# Altium PCB xia.PcbDoc
Units mil, origin at the board's own origin, x right, y up, seen from the top; angles counter-clockwise.
Board outline 5748.08 x 1771.65 mil, 2 copper layers (Top Layer, Bottom Layer); 4 components, 41 nets, 122 pads, 0 vias.
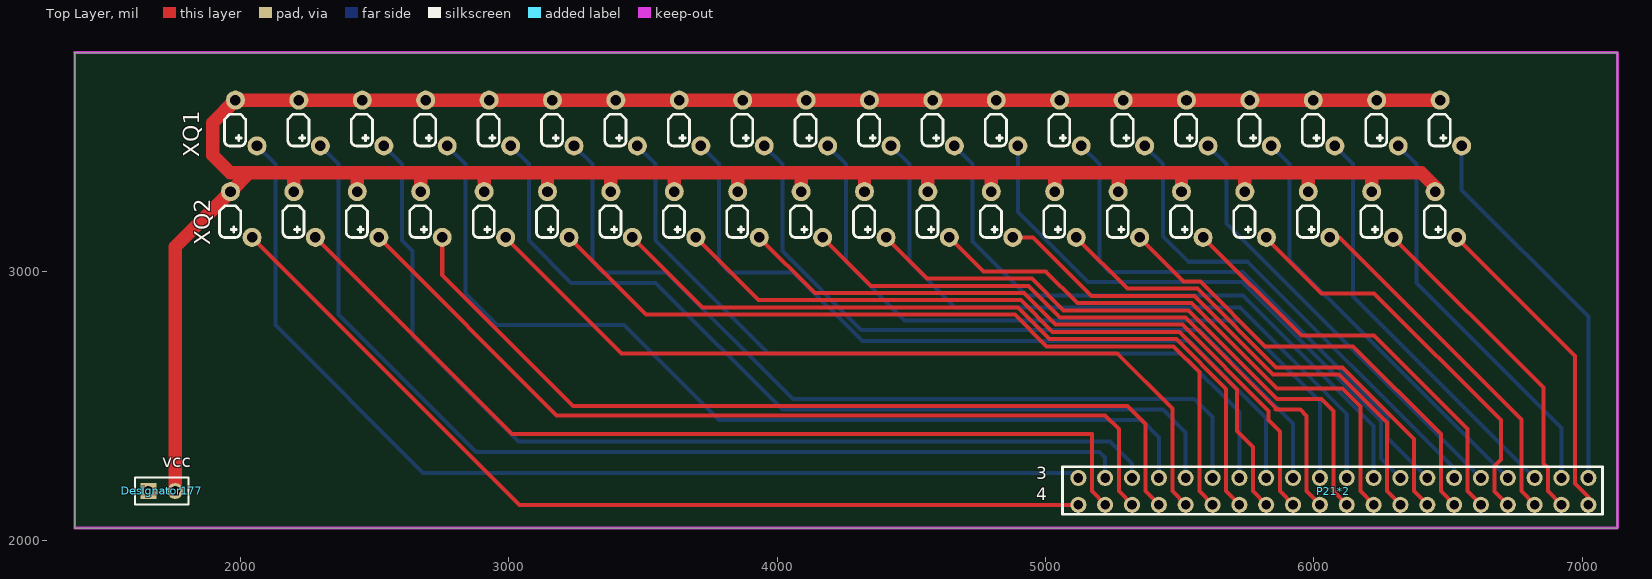
[diagram p0: Top Layer view]
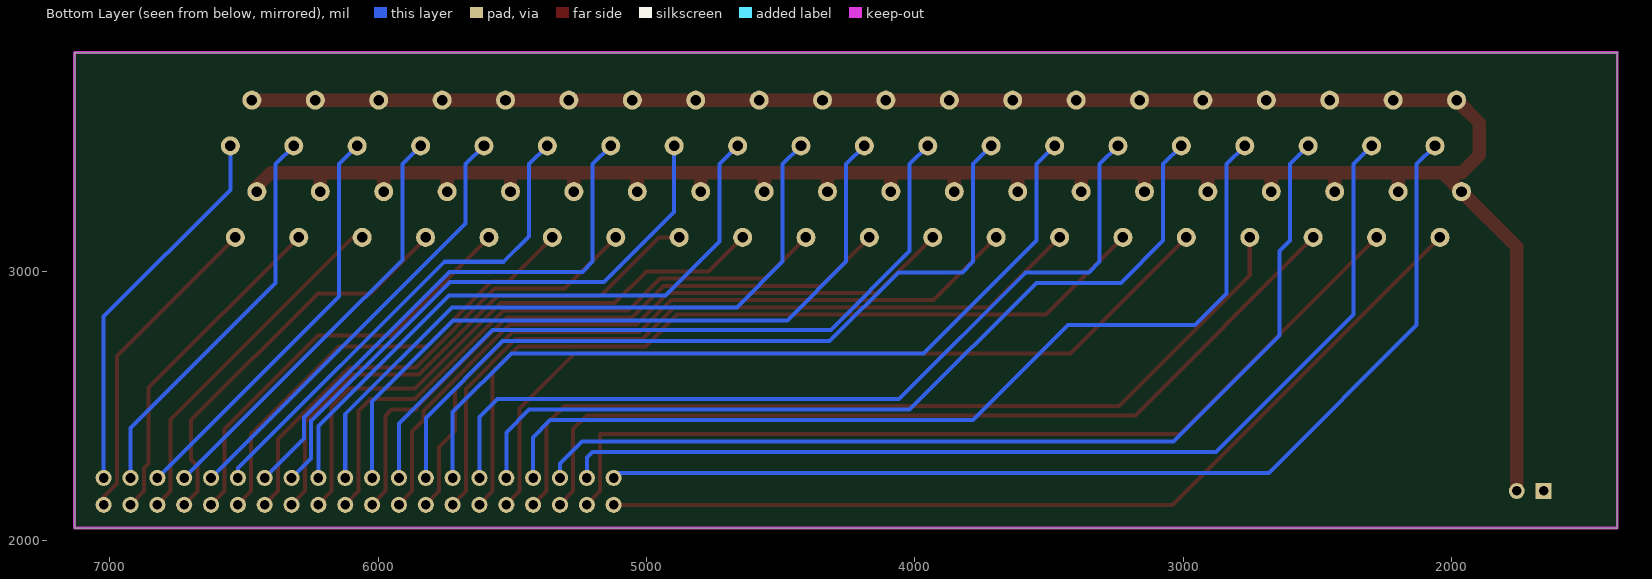
[diagram p1: Bottom Layer view, seen from below]

## Layer stack, top to bottom
Top Layer: signal copper 1.4
Dielectric: dielectric 12.6, FR-4, Dk 4.8
Bottom Layer: signal copper 1.4

## Board outline
1382.8,2044.94 1382.8,3816.55 1382.84,3816.6 7130.87,3816.6 7130.87,2044.94

## Design rules (kind name [scope] priority, off if disabled: settings)
Clearance [All] p1: gap=7
PolygonConnect [All] p1: connectstyle=Relief reliefconductorwidth=10 reliefentries=4 polygonreliefangle="90 Angle" airgapwidth=10
RoutingVias [All] p1: holewidth=28 width=50 viastyle="Through Hole" minholewidth=28 minwidth=50 maxholewidth=28 maxwidth=50
SilkToSolderMaskClearance [IsPad] p1: minsilkscreentomaskgap=0 clearancetoexposedcopper=TRUE
SolderMaskExpansion [All] p1: expansion=4
Width [All] p1: maxlimit=100 minlimit=7 preferedwidth=10
27 further rules are at their usual default settings.

## Components (designator, comment, footprint, x,y, rotation, side; value= is the part's Value field where it differs from the comment)
Designator177 "" HDR1X2 1657,2183 r0 top
P21*2 "Header 21X2" XinPian 5122.14,2131.56 r180 top
XQ1 "Header 20X2" XIANQUAN1 6550.17,3468.57 r180 top
XQ2 "Header 20X2" XIANQUAN1 6531.61,3127.62 r180 top

## Footprints (in the part's own frame and the unit in brackets; to place one, negate y for a bottom-side part, rotate by r counter-clockwise, add the part's x,y. Pads: shape width x height; smd on the part's side, far side on the other; paste and mask are expansions set on the pad)
HDR1X2 [mm] "Connector; Header; 2 Position"
  rect 1.5x1.5 hole 0.9: 1(0,0)
  round 1.5 hole 0.9: 2(2.54,0)
  silkscreen extent -1.27,-1.27 3.81,1.27
XIANQUAN1 [mm]
  round 1.8 hole 1: 1(2.04,-4.34) 2(0,0) 3(8.04,-4.34) 4(6,0) 5(14.04,-4.34) 6(12,0) 7(20.04,-4.34) 8(18,0) 9(26.04,-4.34) 10(24,0) 11(32.04,-4.34) 12(30,0) 13(38.04,-4.34) 14(36,0) 15(44.04,-4.34) 16(42,0) 17(50.04,-4.34) 18(48,0) 19(56.04,-4.34) 20(54,0) 21(62.04,-4.34) 22(60,0) 23(68.04,-4.34) 24(66,0) 25(74.04,-4.34) 26(72,0) 27(80.04,-4.34) 28(78,0) 29(86.04,-4.34) 30(84,0) 31(92.04,-4.34) 32(90,0) 33(98.04,-4.34) 34(96,0) 35(104.04,-4.34) 36(102,0) 37(110.04,-4.34) 38(108,0) 39(116.04,-4.34) 40(114,0)
  silkscreen extent 1.08,-3 117.08,0
XinPian [mil]
  round 60 hole 36: 1(0,-100) 2(-100,-100) 3(-200,-100) 4(-300,-100) 5(-400,-100) 6(-500,-100) 7(-600,-100) 8(-700,-100) 9(-800,-100) 10(-900,-100) 11(-1000,-100) 12(-1100,-100) 13(-1200,-100) 14(-1300,-100) 15(-1400,-100) 16(-1500,-100) 17(-1600,-100) 18(-1700,-100) 19(-1800,-100) 20(-1900,-100) 21(-1900,0) 22(-1800,0) 23(-1700,0) 24(-1600,0) 25(-1500,0) 26(-1400,0) 27(-1300,0) 28(-1200,0) 29(-1100,0) 30(-1000,0) 31(-900,0) 32(-800,0) 33(-700,0) 34(-600,0) 35(-500,0) 36(-400,0) 37(-300,0) 38(-200,0) 39(-100,0) 40(0,0)
  silkscreen extent -1953,-142 59,35

## Part data
P21*2: library part "Header 22X2", "Header, 22-Pin, Dual row"
XQ1 XQ2: "Header, 20-Pin, Dual row"

## Nets (pads, with @x,y where several pads share a name; then routed paths per layer and width w, separated by ;. In a path a pad name is that pad's centre, name@x,y a point inside that pad or via, vN(x,y) a via of type N, cw(c..) or ccw(c..) an arc to the next point about the centre after c; other vN are vias at no path point)
GND: Designator177.2 XQ1.1 XQ1.3 XQ1.5 XQ1.7 XQ1.9 XQ1.11 XQ1.13 XQ1.15 XQ1.17 XQ1.19 XQ1.21 XQ1.23 XQ1.25 XQ1.27 XQ1.29 XQ1.31 XQ1.33 XQ1.35 XQ1.37 XQ1.39 XQ2.1 XQ2.3 XQ2.5 XQ2.7 XQ2.9 XQ2.11 XQ2.13 XQ2.15 XQ2.17 XQ2.19 XQ2.21 XQ2.23 XQ2.25 XQ2.27 XQ2.29 XQ2.31 XQ2.33 XQ2.35 XQ2.37 XQ2.39 | length 11927.5
  Top Layer w50: Designator177.2 1757,3092.39 XQ2.39 2032.79,3368.17 ; XQ2.37 2199.32,3366.6 2200.9,3368.17 ; XQ2.35 2435.54,3365.81 2437.9,3368.17 ; XQ2.33 2671.76,3364.63 2675.31,3368.17 ; XQ2.31 2907.98,3366.6 2909.56,3368.17 ; XQ2.29 3144.2,3365.81 3146.57,3368.17 ; XQ2.27 3380.42,3360.69 3387.9,3368.17 ; XQ2.25 3616.64,3361.87 3622.94,3368.17 ; XQ2.23 3852.87,3368.17 ; XQ2.21 4089.09,3367.78 ; XQ2.19 4325.31,3367.78 ; XQ2.17 4561.53,3362.66 4567.04,3368.17 ; XQ2.15 4797.75,3365.81 4800.11,3368.17 ; XQ2.13 5033.97,3360.69 5041.45,3368.17 ; XQ2.11 5270.19,3364.63 5273.73,3368.17 ; XQ2.9 5506.41,3358.72 5515.86,3368.17 ; XQ2.7 5742.63,3362.66 5748.14,3368.17 ; XQ2.5 5978.85,3366.6 5980.42,3368.17 ; XQ2.3 6215.07,3367.78 6215.46,3368.17 ; XQ2.1 6451.29,3316.2 6399.32,3368.17 6215.46,3368.17 ; XQ1.1 XQ1.39 1897.35,3555.12 1897.35,3433.53 1962.71,3368.17 2032.79,3368.17 ; 2032.79,3368.17 2200.9,3368.17 ; 2200.9,3368.17 2437.9,3368.17 ; 2437.9,3368.17 2675.31,3368.17 ; 2675.31,3368.17 2909.56,3368.17 ; 2909.56,3368.17 3146.57,3368.17 ; 3146.57,3368.17 3387.9,3368.17 ; 3387.9,3368.17 3622.94,3368.17 ; 3622.94,3368.17 3852.87,3368.17 ; 3852.87,3368.17 4567.04,3368.17 ; 4567.04,3368.17 4800.11,3368.17 ; 4800.11,3368.17 5041.45,3368.17 ; 5041.45,3368.17 5273.73,3368.17 ; 5273.73,3368.17 5515.86,3368.17 ; 5515.86,3368.17 5748.14,3368.17 ; 5748.14,3368.17 5980.42,3368.17 ; 5980.42,3368.17 6215.46,3368.17
XQ1_1: P21*2.20 XQ1.2 | length 1432.5
  Bottom Layer w15: XQ1.2 6550.17,3304.83 7022.14,2832.86 P21*2.20
XQ1_2: P21*2.19 XQ1.4 | length 1488.9
  Bottom Layer w15: XQ1.4 6381.98,3400.53 6381.98,2958.33 6922.14,2418.17 P21*2.19
XQ1_3: P21*2.18 XQ1.6 | length 1545.4
  Bottom Layer w15: XQ1.6 6145.76,3400.53 6145.76,2907.94 P21*2.18
XQ1_4: P21*2.17 XQ1.8 | length 1602.2
  Bottom Layer w15: XQ1.8 5909.54,3400.53 5909.54,3043.46 6191.52,2761.48 6192.22,2761.48 P21*2.17
XQ1_5: P21*2.16 XQ1.10 | length 1658.2
  Bottom Layer w15: XQ1.10 5673.32,3400.53 5673.32,3180.38 P21*2.16
XQ1_6: P21*2.15 XQ1.12 | length 1844.1
  Bottom Layer w15: XQ1.12 5437.1,3400.53 5437.1,3131.9 5532,3037 5753,3037 6522.14,2267.86 P21*2.15
XQ1_7: P21*2.14 XQ1.14 | length 2060.5
  Bottom Layer w15: XQ1.14 5200.88,3400.53 5200.88,3037.07 5238.95,2999 5733,2999 6275.76,2456.24 6275.76,2377.94 P21*2.14
XQ1_8: P21*2.13 XQ1.16 | length 2163.2
  Bottom Layer w15: XQ1.16 4896.62,3223.22 5157.84,2962 5731,2962 6248.95,2444.05 6248.95,2304.75 P21*2.13
XQ1_9: P21*2.12 XQ1.18 | length 2356.6
  Bottom Layer w15: XQ1.18 4728.44,3400.53 4728.44,3112.56 4929,2912 5736,2912 6222.14,2425.86 P21*2.12
XQ1_10: P21*2.11 XQ1.20 | length 2562.3
  Bottom Layer w15: XQ1.20 4492.22,3400.53 4492.22,3037.07 4662.29,2867 5724,2867 6122.14,2468.86 P21*2.11
XQ1_11: P21*2.10 XQ1.22 | length 2726.6
  Bottom Layer w15: XQ1.22 4256,3400.53 4256,3037.07 4474.07,2819 5720,2819 6022.14,2516.86 P21*2.10
XQ1_12: P21*2.9 XQ1.24 | length 2791.2
  Bottom Layer w15: XQ1.24 4019.78,3400.53 4019.78,3076.44 4313.22,2783 5573.06,2783 5922.14,2433.92 P21*2.9
XQ1_13: P21*2.8 XQ1.26 | length 2962.9
  Bottom Layer w15: XQ1.26 3783.56,3400.53 3783.56,3037.07 3822.93,2997.7 4060.6,2997.7 4317.3,2741 5536.32,2741 5822.14,2455.18 P21*2.8
XQ1_14: P21*2.7 XQ1.28 | length 3065.5
  Bottom Layer w15: XQ1.28 3547.34,3400.53 3547.34,3115.81 3967.15,2696 5502.58,2696 5722.14,2476.44 P21*2.7
XQ1_15: P21*2.6 XQ1.30 | length 3237.2
  Bottom Layer w15: XQ1.30 3311.12,3400.53 3311.12,3037.07 3350.49,2997.7 3586.71,2997.7 4059.15,2525.26 5555.21,2525.26 5622.14,2458.33 P21*2.6
XQ1_16: P21*2.5 XQ1.32 | length 3293.6
  Bottom Layer w15: XQ1.32 3074.9,3400.53 3074.9,3115.81 3232.38,2958.33 3547.34,2958.33 4019.78,2485.89 5437.1,2485.89 5522.14,2400.85 P21*2.5
XQ1_17: P21*2.4 XQ1.34 | length 3534.5
  Bottom Layer w15: XQ1.34 2838.68,3400.53 2838.68,2918.96 2956.79,2800.85 3429.23,2800.85 3783.56,2446.52 5358.36,2446.52 5422.14,2382.74 P21*2.4
XQ1_18: P21*2.3 XQ1.36 | length 3683.2
  Bottom Layer w15: XQ1.36 2602.46,3400.53 2602.46,3115.81 2641.83,3076.44 2641.83,2761.48 3035.53,2367.78 5240.25,2367.78 5322.14,2285.89 P21*2.3
XQ1_19: P21*2.2 XQ1.38 | length 3808.8
  Bottom Layer w15: XQ1.38 2366.24,3400.53 2366.24,2840.22 2878.05,2328.41 5200.88,2328.41 5222.14,2307.15 P21*2.2
XQ1_20: P21*2.1 XQ1.40 | length 3923.8
  Bottom Layer w15: XQ1.40 2130.02,3400.53 2130.02,2800.85 2681.2,2249.67 5104.03,2249.67 P21*2.1
XQ2_1: P21*2.21 XQ2.2 | length 1199.2
  Top Layer w15: XQ2.2 6972.83,2686.4 6972.83,2210 7022.14,2160.69 P21*2.21
XQ2_2: P21*2.22 XQ2.4 | length 1255.7
  Top Layer w15: XQ2.4 6854.43,2568.58 6854.43,2286.04 6871.45,2269.01 6871.45,2182.25 P21*2.22
XQ2_3: P21*2.23 XQ2.6 | length 1332.8
  Top Layer w15: XQ2.6 6094.58,3127.62 6772.83,2449.37 6772.83,2182.25 6822.14,2132.94 P21*2.23
XQ2_4: P21*2.24 XQ2.8 | length 1503.8
  Top Layer w15: XQ2.8 5822.94,3123.67 6027.65,2918.96 6224.5,2918.96 6696.94,2446.52 6696.94,2300.21 6672.83,2276.1 6672.83,2180.87 P21*2.24
XQ2_5: P21*2.25 XQ2.10 | length 1584.1
  Top Layer w15: XQ2.10 5952.86,2761.48 6224.5,2761.48 6572.83,2413.15 6572.83,2182.25 6622.14,2132.94 P21*2.25
XQ2_6: P21*2.26 XQ2.12 | length 1709.7
  Top Layer w15: XQ2.12 5514.72,2963.41 5576.42,2963.41 5817.72,2722.11 6145.76,2722.11 6472.83,2395.04 6472.83,2182.25 6522.14,2132.94 P21*2.26
XQ2_7: P21*2.27 XQ2.14 | length 1835.3
  Top Layer w15: XQ2.14 5305.31,2936.6 5565.32,2936.6 5858.54,2643.37 6106.39,2643.37 6372.83,2376.93 6372.83,2182.25 6422.14,2132.94 P21*2.27
XQ2_8: P21*2.28 XQ2.16 | length 2007
  Top Layer w15: XQ2.16 4952.85,3127.62 5170.69,2909.79 5554.21,2909.79 5847.44,2616.56 6093.83,2616.56 6272.83,2437.56 6272.83,2182.25 6322.14,2132.94 P21*2.28
XQ2_9: P21*2.29 XQ2.18 | length 2178.8
  Top Layer w15: XQ2.18 4768.38,3001.09 5000.65,3001.09 5118.76,2882.98 5543.1,2882.98 5861.45,2564.63 6106.39,2564.63 6172.83,2498.19 6172.83,2182.25 6222.14,2132.94 P21*2.29
XQ2_10: P21*2.30 XQ2.20 | length 2304.4
  Top Layer w15: XQ2.20 4558.97,2974.28 4948.72,2974.28 5066.83,2856.17 5532,2856.17 5862.9,2525.26 6027.65,2525.26 6072.83,2480.08 6072.83,2182.25 6122.14,2132.94 P21*2.30
XQ2_11: P21*2.31 XQ2.22 | length 2433.9
  Top Layer w15: XQ2.22 4349.56,2947.46 4936.16,2947.46 5054.27,2829.35 5520.89,2829.35 5857.61,2492.63 5857.61,2485.89 5948.91,2485.89 5972.83,2461.97 5972.83,2182.25 6022.14,2132.94 P21*2.31
XQ2_12: P21*2.32 XQ2.24 | length 2553
  Top Layer w15: XQ2.24 4140.15,2920.65 4919.24,2920.65 5037.35,2802.54 5509.79,2802.54 5830.8,2481.53 5830.8,2446.52 5872.83,2404.49 5872.83,2182.25 5922.14,2132.94 P21*2.32
XQ2_13: P21*2.33 XQ2.26 | length 2725.6
  Top Layer w15: XQ2.26 3930.74,2893.84 4908.13,2893.84 5026.24,2775.73 5498.68,2775.73 5712.69,2561.72 5712.69,2407.15 5772.83,2347.01 5772.83,2182.25 5822.14,2132.94 P21*2.33
XQ2_14: P21*2.34 XQ2.28 | length 2898.2
  Top Layer w15: XQ2.28 3721.33,2867.03 4897.03,2867.03 5015.14,2748.92 5487.58,2748.92 5672.83,2563.67 5672.83,2182.25 5722.14,2132.94 P21*2.34
XQ2_15: P21*2.35 XQ2.30 | length 3070.8
  Top Layer w15: XQ2.30 3511.92,2840.22 4885.92,2840.22 5004.03,2722.11 5476.47,2722.11 5572.83,2625.75 5572.83,2182.25 5622.14,2132.94 P21*2.35
XQ2_16: P21*2.36 XQ2.32 | length 3127.2
  Top Layer w15: XQ2.32 3420.62,2695.3 5267.06,2695.3 5472.83,2489.53 5472.83,2182.25 5522.14,2132.94 P21*2.36
XQ2_17: P21*2.37 XQ2.34 | length 3311.6
  Top Layer w15: XQ2.34 2752.08,2987.92 3240,2500 5304.88,2500 5372.83,2432.05 5372.83,2182.25 5422.14,2132.94 P21*2.37
XQ2_18: P21*2.38 XQ2.36 | length 3355.4
  Top Layer w15: XQ2.36 3178.48,2465 5221.77,2465 5272.83,2413.94 5272.83,2182.25 5322.14,2132.94 P21*2.38
XQ2_19: P21*2.39 XQ2.38 | length 3481
  Top Layer w15: XQ2.38 3011.43,2395.83 5172.83,2395.83 5172.83,2182.25 5222.14,2132.94 P21*2.39
XQ2_20: P21*2.40 XQ2.40 | length 3491.3
  Top Layer w15: XQ2.40 3039.48,2131.56 P21*2.40
pads on no net: Designator177.1

## Keep-outs
Keep-Out Layer:
  lines w10: 1381.98,3816.55 1382.03,3816.6 ; 1382.8,3816.55 1382.8,2044.94 7130.87,2044.94 7130.87,3816.6
  lines w11.81: 1382.84,3816.6 7130.87,3816.6

## Silkscreen, mask and mechanical layers (free items; w line width, h text height)
Top Overlay:
  text "vcc" at 1709,2254 h79.37
  text "3" at 4964.66,2210.3 h79.37
  text "4" at 4964.66,2131.56 h79.37
Mechanical 1:
  circle w10: c5200.93,2604.05 r59.06
  circle w10: c3311.17,2604.05 r59.06
  circle w10: c6914.39,3599.72 r59.06
  circle w10: c6914.39,3383.57 r59.06
  circle w10: c6914.39,3166.64 r59.06
  circle w10: c1599.43,3166.64 r59.06
  circle w10: c1599.43,3383.57 r59.06
  circle w10: c1599.43,3599.72 r59.06